# Altium PCB PCB.PcbDoc
Units mil, origin at the board's own origin, x right, y up, seen from the top; angles counter-clockwise.
Board outline 3000 x 2000 mil, 2 copper layers (Top Layer, Bottom Layer); 59 components, 47 nets, 259 pads, 80 vias.
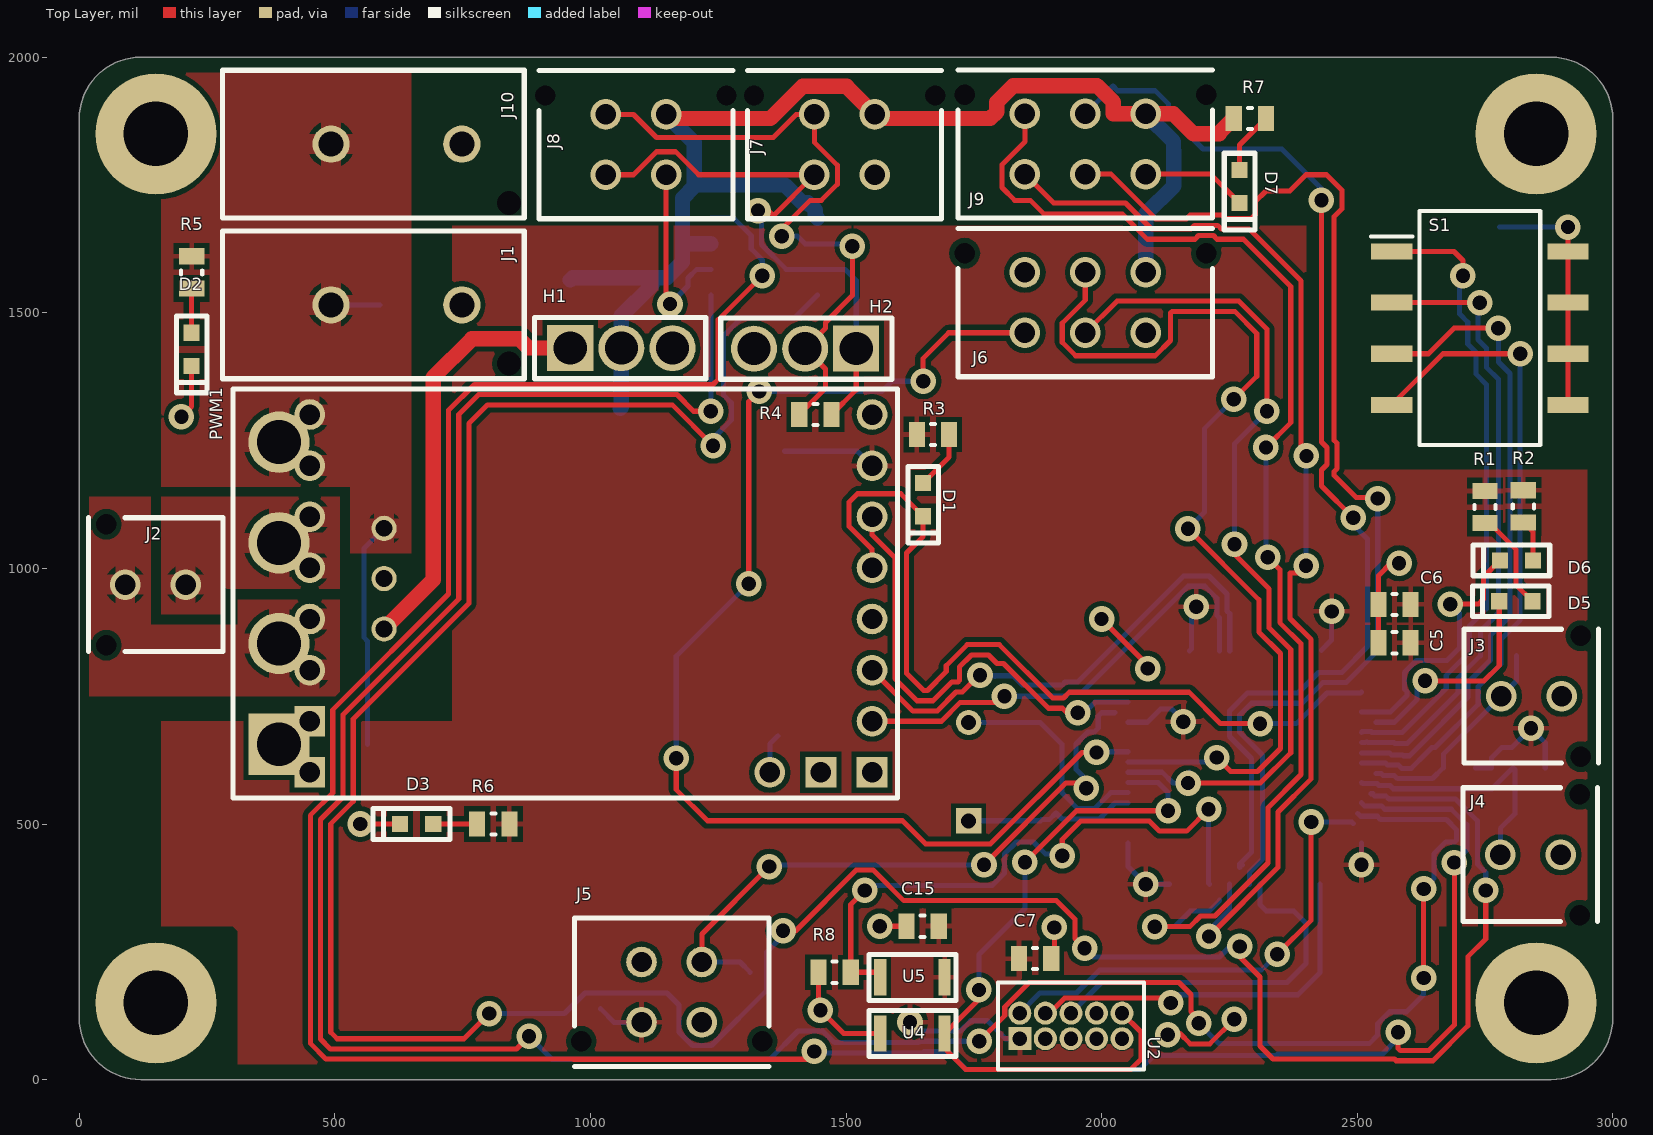
[diagram p0: Top Layer view]
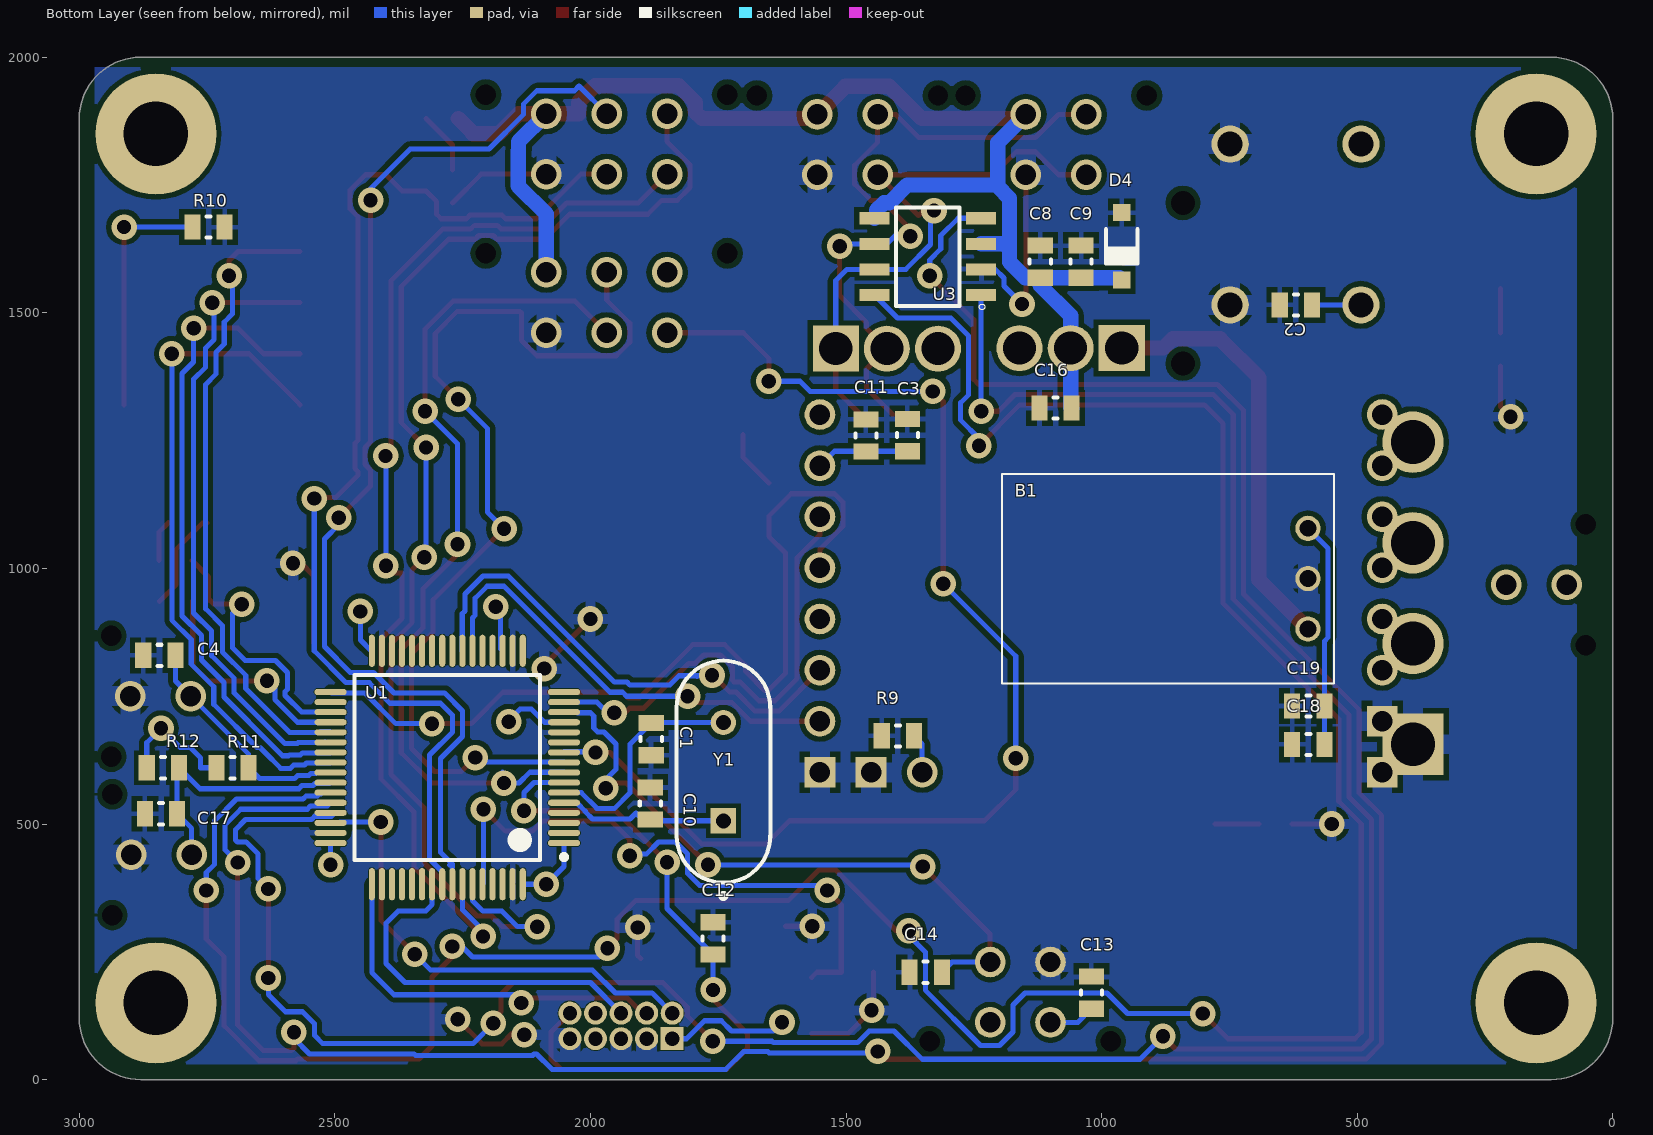
[diagram p1: Bottom Layer view, seen from below]

## Layer stack, top to bottom
Top Solder: solder mask 0.4, Solder Resist, Dk 3.5
Top Layer: signal copper 1.4
Dielectric 1: dielectric 12.6, FR-4, Dk 4.8
Bottom Layer: signal copper 1.4
Bottom Solder: solder mask 0.4, Solder Resist, Dk 3.5

## Board outline
0,120 0,1880 cw(c120,1880) 120,2000 2880,2000 cw(c2880,1880) 3000,1880 3000,120 cw(c2880,120) 2880,0 120,0 cw(c120,120)

## Design rules (kind name [scope] priority, off if disabled: settings)
Clearance PAD_CLEARANCE [InComponent('U1') Or InComponent('U2')] p1: gap=2 ignorepadtopadclearanceinfootprint=TRUE except(0: Arc-Hole Track-Hole SMDPad-Hole THPad-Hole Via-Hole Fill-Hole Poly-Hole Region-Hole Text-Hole)
Clearance [All] p2: gap=10 ignorepadtopadclearanceinfootprint=FALSE except(0: Arc-Hole Track-Hole SMDPad-Hole THPad-Hole Via-Hole Fill-Hole Poly-Hole Region-Hole Text-Hole)
ComponentClearance Ignore [InComponent('PWM1')] p1: gap=0 collisioncheckmode=3 verticalgap=0 showdistances=FALSE
ComponentClearance [All] p2: gap=10 collisioncheckmode=3 verticalgap=10 showdistances=FALSE
PolygonConnect HIGH_CURRENT_POLY [IsNamedPolygon('+24_L01_P004') Or IsNamedPolygon('MOT_OUT_A_L01_P008') Or IsNamedPolygon('MOT_OUT_B_L01_P010') Or IsNamedPolygon('GND_L02_P018')] p1: thpad.connectstyle=Relief thpad.reliefconductorwidth=40 thpad.reliefentries=4 thpad.polygonreliefangle="90 Angle" thpad.airgapwidth=10 smdpad.connectstyle=Relief smdpad.reliefconductorwidth=10 smdpad.reliefentries=4 smdpad.polygonreliefangle="90 Angle" smdpad.airgapwidth=10 via.connectstyle=Relief via.reliefconductorwidth=20 via.reliefentries=4 via.polygonreliefangle="90 Angle" via.airgapwidth=10
PolygonConnect [All] p2: connectstyle=Relief reliefconductorwidth=10 reliefentries=4 polygonreliefangle="90 Angle" airgapwidth=10
RoutingVias [All] p1: holewidth=28 width=50 viastyle="Through Hole" minholewidth=28 minwidth=50 maxholewidth=28 maxwidth=50
SolderMaskExpansion [All] p1: expansion=4
Width 5V [(InNet('SEL_5V') OR InNet('NetB1_3'))] p1: maxlimit=50 minlimit=30 preferedwidth=30 minimp=50.000000 maximp=50.000000 favimp=50.000000
Width [All] p2: maxlimit=10 minlimit=10 preferedwidth=10
29 further rules are at their usual default settings.

## Classes and differential pairs
component class Power: B1 C2 C3 C9 C11 C18 C19 D1 D2 D3 D4 D7 H1 J1 J2 J10 PWM1 R3 R5 R6 R7 R9
component class Peripherals: C4 C7 C8 C13 C14 C16 C17 H2 J3 J4 J5 J6 J7 J8 J9 R4 R11 R12 U2 U3
component class Microcontroller: C1 C5 C6 C10 C12 C15 D5 D6 R1 R2 R8 R10 S1 U1 U4 U5 v Y1

## Components (designator, comment, footprint, x,y, rotation, side; value= is the part's Value field where it differs from the comment)
B1 "OKI-78SR-5_1.5-W36H-C" OKI-78SR-HORIZONTAL 870,980 r90 bottom locked
C1 "Cap Semi" RESC2013X60X35LL10T20 1880.92,666.07 r270 bottom value=20pF
C2 "Cap Semi" RESC2013X60X35LL10T20 620,1515.51 r180 bottom locked value=10uF
C3 "Cap Semi" RESC2013X60X35LL10T20 1379.88,1260.74 r270 bottom value=0.1uF
C4 "Cap Semi" RESC2013X60X35LL10T20 2843.17,830 r0 bottom value=0.1uF
C5 "Cap Semi" RESC2013X60X35LL10T20 2573.09,854.57 r0 top value=10uF
C6 "Cap Semi" RESC2013X60X35LL10T20 2573.09,929.54 r0 top value=0.1uF
C7 "Cap Semi" RESC2013X60X35LL10T20 1870,236.66 r180 top value=0.1uF
C8 "Cap Semi" RESC2013X60X35LL10T20 1120,1600 r270 bottom value=0.1uF
C9 "Cap Semi" RESC2013X60X35LL10T20 1040,1600 r270 bottom value=0.1uF
C10 "Cap Semi" RESC2013X60X35LL10T20 1882.82,540 r90 bottom value=20pF
C11 "Cap Semi" RESC2013X60X35LL10T20 1461.16,1260 r270 bottom value=0.1uF
C12 "Cap Semi" RESC2013X60X35LL10T20 1760,276.35 r270 bottom value=0.1uF
C13 "Cap Semi" RESC2013X60X35LL10T20 1020,170 r90 bottom value=0.1uF
C14 "Cap Semi" RESC2013X60X35LL10T20 1344.05,210 r0 bottom value=0.1uF
C15 "Cap Semi" RESC2013X60X35LL10T20 1650,300 r0 top value=0.1uF
C16 "Cap Semi" RESC2013X60X35LL10T20 1090,1313.52 r180 bottom value=0.1uF
C17 "Cap Semi" RESC2013X60X35LL10T20 2840,520 r0 bottom value=0.1uF
C18 "Cap Semi" RESC2013X60X35LL10T20 595.63,655.85 r180 bottom value=10uF
C19 "Cap Semi" RESC2013X60X35LL10T20 595.63,730.82 r180 bottom value=0.1uF
D1 "RED" LED 1650.96,1134.55 r270 top
D2 "GRN" LED 220,1428.58 r270 top
D3 "GRN" LED 660,500 r180 top
D4 "5.1V" VISH-SOD-123-2_V 960.56,1630 r270 bottom
D5 "GRN" LED 2810.42,935.74 r180 top
D6 "RED" LED 2811.73,1015.75 r180 top
D7 "GRN" LED 2270,1747.22 r270 top
H1 "JMPR_HEADER_3P" STD3P 880.56,1496.02 r0 top
H2 "JMPR_HEADER_3P" STD3P 1600,1365 r180 top
J1 "24V In" 1510482204 280,1660 r270 top locked
J2 "MOT_OUT" 0430450227 208.11,968.11 r90 top locked
J3 "0430450227" 0430450227 2781.89,750 r270 top
J4 "0430450227" 0430450227 2780,440 r270 top
J5 "0430450427" 0430450427 1159.06,170.94 r0 top
J6 "0430450627" 0430450627 2027.17,1520.12 r180 top
J7 "0430450427" 0430450427 1497.17,1829.06 r180 top locked
J8 "0430450427" 0430450427 1089.06,1829.06 r180 top locked
J9 "0430450627" 0430450627 2027.17,1830.29 r180 top
J10 "24V Out" 1510482204 280,1974.49 r270 top locked
PWM1 "6.5V - 40V" Pololu_G2_Driver_24v21 1600.95,1351.01 r180 top locked
R1 "60" RESC2013X60X35LL10T20 2750.03,1120 r90 top
R2 "60" RESC2013X60X35LL10T20 2825,1121.5 r90 top
R3 "60" RESC2013X60X35LL10T20 1670,1262.04 r180 top
R4 "120" RESC2013X60X35LL10T20 1440,1301.01 r180 top
R5 "1.5k" RESC2013X60X35LL10T20 220,1579.17 r90 top
R6 "60" RESC2013X60X35LL10T20 810,500 r0 top
R7 "145" RESC2013X60X35LL10T20 2290,1880 r180 top
R8 "1.5k" RESC2013X60X35LL10T20 1477.82,210 r0 top
R9 "50k" RESC2013X60X35LL10T20 1398.5,672.49 r180 bottom
R10 "1.5k" RESC2013X60X35LL10T20 2746.95,1667.76 r0 bottom
R11 "50k" RESC2013X60X35LL10T20 2700,610 r180 bottom
R12 "50k" RESC2013X60X35LL10T20 2836.5,610 r180 bottom
S1 "219-4MSTR" SOP254P991X385-8N 2740,1470 r0 top locked
U1 "STM32F334R8T6" STM-LQFP64_L 2280,610.49 r0 bottom
U2 "SAMTEC-FTSH-105-01-X-D" SAMTEC-FTSH-105-01-X-D 1940,105 r0 top
U3 "MCP2562-E/SN" SOIC127P600X175-8N 1340,1610 r0 bottom
U4 "B3U-1100P" "B3U-1100P - duplicate" 1630,90 r180 top
U5 "B3U-1100P" "B3U-1100P - duplicate" 1630,200.01 r0 top
Y1 "25MHz" ADAI-THHF-49S3 1740,602.32 r90 bottom

## Footprints (in the part's own frame and the unit in brackets; to place one, negate y for a bottom-side part, rotate by r counter-clockwise, add the part's x,y. Pads: shape width x height; smd on the part's side, far side on the other; paste and mask are expansions set on the pad)
0430450227 [mil] "Molex Micro fit 3.0"
  round 60 hole 40: 1(0,0) 2(0,118.11)
  round 0 hole 40 unplated: ""(-118.11,155.12) ""(118.11,155.12)
  silkscreen extent -131,-73 131,190
0430450427 [mil] "Molex micro-fit 3.0 4 pos"
  round 60 hole 40: 1(-59.06,59.06) 2(-59.06,-59.06) 3(59.06,59.06) 4(59.06,-59.06)
  round 0 hole 40 unplated: 7(177.17,-96.06) ""(-177.17,-96.06)
  silkscreen extent -190,-145 190,145
0430450627 [mil] "Molex micro-fit 3.0 6 position"
  round 60 hole 40: 1(-59.05,59.05) 2(-59.05,-59.06) 3(59.06,59.05) 4(59.06,-59.06) 5(177.17,59.05) 6(177.17,-59.06)
  round 0 hole 40 unplated: 7(295.28,-96.06) ""(-177.16,-96.06)
  silkscreen extent -190,-145 308,145
1510482204 [mm] "Molex 6.5MM 2 pin connector, used for power connections. P/N 1510482204 and similar models."
  round 1.85 hole 1.25: 1(3.67,5.4) 2(3.67,11.9)
  round 0 hole 1.2 unplated: 9(6.59,14.25)
  Top Layer region: 4.826,3.175
  silkscreen extent 0,0 7.34,15
ADAI-THHF-49S3 [mm] "THD, 2-Leads, Body 11.05x4.65mm, Pitch 4.88mm"
  rect 1.25x1.25 hole 0.75: 1(-2.44,0)
  round 1.25 hole 0.75: 2(2.44,0)
  silkscreen extent -6.3,-2.34 5.52,2.33, body extent -5.53,-2.34 5.53,2.33, height 3.5
"B3U-1100P - duplicate" [mm]
  rect 0.6x1.8 smd: 1(-1.6,0) 2(1.6,0)
  silkscreen extent -2.16,-1.14 2.16,1.14
LED [mm]
  rect 0.8x0.8 smd: 1(-0.825,0) 2(0.825,0)
  silkscreen extent -1.65,-0.76 2.16,0.76
OKI-78SR-HORIZONTAL [mm]
  round 1.252 hole 0.835: 1(2.5,-6.95) 2(0,-6.95) 3(-2.5,-6.95)
  silkscreen extent -5.2,-8.25 5.2,8.25
Pololu_G2_Driver_24v21 [mil] "Pololu G2 High-Power Motor Driver 24v21"
  rect 120x120 hole 86: 1(1210,695)
  rect 60x60 hole 40: 1a(1150,750) 1b(1150,650) 14(50,750) 15(150,750)
  round 120 hole 86: 2(1210,498) 3(1210,301) 4(1210,104)
  round 60 hole 40: 2a(1150,550) 2b(1150,450) 3a(1150,350) 3b(1150,250) 4a(1150,150) 4b(1150,50) 7(50,50) 8(50,150) 9(50,250) 10(50,350) 11(50,450) 12(50,550) 13(50,650) 16(250,750)
  silkscreen extent 0,0 1300,800
RESC2013X60X35LL10T20 [mm]
  rect 0.8x1.25 smd: 1(-0.8,0) 2(0.8,0)
  silkscreen extent -0.1,-0.53 0.1,0.53, body extent -1.05,-0.67 1.05,0.67, height 0.6
SAMTEC-FTSH-105-01-X-D [mil]
  rect 45x45 hole 27.95: 1(-100,-25)
  round 45 hole 27.95: 2(-100,25) 3(-50,-25) 4(-50,25) 5(0,-25) 6(0,25) 7(50,-25) 8(50,25) 9(100,-25) 10(100,25)
  silkscreen extent -143,-85 143,85
SOIC127P600X175-8N [mm]
  rect 1.5x0.6 smd: 1(-2.65,1.905) 2(-2.65,0.635) 3(-2.65,-0.635) 4(-2.65,-1.905) 5(2.65,-1.905) 6(2.65,-0.635) 7(2.65,0.635) 8(2.65,1.905)
  silkscreen extent -2.84,-2.45 1.58,2.64
SOP254P991X385-8N [mm]
  rect 2.05x0.8 smd: 1(-4.375,3.81) 2(-4.375,1.27) 3(-4.375,-1.27) 4(-4.375,-3.81) 5(4.375,-3.81) 6(4.375,-1.27) 7(4.375,1.27) 8(4.375,3.81)
  silkscreen extent -5.4,-5.81 3,5.82
STD3P [mil]
  rect 90x90 hole 65: 1(80,-65)
  round 90 hole 65: 2(180,-65) 3(280,-65)
  silkscreen extent 10,-125 345,-5
STM-LQFP64_L [mm] "QFP, 64-Leads, Body 10x10mm, Pitch 0.5mm, IPC High Density"
  oval 1.6x0.3 smd: 1(-5.8,3.75) 2(-5.8,3.25) 3(-5.8,2.75) 4(-5.8,2.25) 5(-5.8,1.75) 6(-5.8,1.25) 7(-5.8,0.75) 8(-5.8,0.25) 9(-5.8,-0.25) 10(-5.8,-0.75) 11(-5.8,-1.25) 12(-5.8,-1.75) 13(-5.8,-2.25) 14(-5.8,-2.75) 15(-5.8,-3.25) 16(-5.8,-3.75) 33(5.8,-3.75) 34(5.8,-3.25) 35(5.8,-2.75) 36(5.8,-2.25) 37(5.8,-1.75) 38(5.8,-1.25) 39(5.8,-0.75) 40(5.8,-0.25) 41(5.8,0.25) 42(5.8,0.75) 43(5.8,1.25) 44(5.8,1.75) 45(5.8,2.25) 46(5.8,2.75) 47(5.8,3.25) 48(5.8,3.75)
  oval 0.3x1.6 smd: 17(-3.75,-5.8) 18(-3.25,-5.8) 19(-2.75,-5.8) 20(-2.25,-5.8) 21(-1.75,-5.8) 22(-1.25,-5.8) 23(-0.75,-5.8) 24(-0.25,-5.8) 25(0.25,-5.8) 26(0.75,-5.8) 27(1.25,-5.8) 28(1.75,-5.8) 29(2.25,-5.8) 30(2.75,-5.8) 31(3.25,-5.8) 32(3.75,-5.8) 49(3.75,5.8) 50(3.25,5.8) 51(2.75,5.8) 52(2.25,5.8) 53(1.75,5.8) 54(1.25,5.8) 55(0.75,5.8) 56(0.25,5.8) 57(-0.25,5.8) 58(-0.75,5.8) 59(-1.25,5.8) 60(-1.75,5.8) 61(-2.25,5.8) 62(-2.75,5.8) 63(-3.25,5.8) 64(-3.75,5.8)
  silkscreen extent -5.92,-4.6 4.6,4.6, body extent -5,-5 5,5, height 1.6
VISH-SOD-123-2_V [mm] "SMD, 2-Leads, Body 2.7x1.55mm, Height 1.35mm"
  rect 0.85x0.85 smd: 1(-1.675,0) 2(1.675,0)
  silkscreen extent -0.85,-0.78 0.85,0.78, body extent -1.35,-0.77 1.35,0.77, height 1.35

## Part data
B1: "Switching Regulator 7-36Vin 5Vo 1.5A Non-Isolated DC-DC Converter, 5V dc Output, 1.5A", Manufacturer_Name="Murata Electronics", Manufacturer_Part_Number=OKI-78SR-5/1.5-W36H-C, Mouser Part Number=580-OKI78SR51.5W36HC, Datasheet Link=https://componentsearchengine.com/Datasheets/1/OKI-78SR-5_1.5-W36H-C.pdf
C1 C2 C3 C4 C5 C6 C7 C8 C9 C10 C11 C12 C13 C14 C15 C16 C17 C18 C19: "Capacitor (Semiconductor SIM Model)", LatestRevisionDate=29-May-2009, LatestRevisionNote="IPC-7351 Footprint Added.", PackageDescription="Chip Capacitor", PackageReference=C1206, Published=8-Jun-2000, Publisher="Altium Limited"
D1 D2 D3 D5 D6 D7: library part LED0, "Typical INFRARED GaAs LED", LatestRevisionDate=08-Jul-2005, LatestRevisionNote="Mech Layer 1 removed.", PackageDescription="LED; 2 Leads", PackageReference=LED-0, Published=8-Jun-2000, Publisher="Altium Limited"
D4: library part CMP-0931-00020-1, Manufacturer="Vishay Semiconductor", Operating Temperature="-55 to 150 degC", PartNumber=MMSZ5232B-E3-08, Power Dissipation (mW)=500, Test Current (IZT1) (mA)=20, Tolerance="+/- 5%", Zener Voltage (NOM.) (V)=5.6, ComponentLink1Description="Manufacturer URL", ComponentLink1URL=http://www.vishay.com/, ComponentLink2Description=Datasheet, ComponentLink2URL=http://www.vishay.com/docs/85774/mmsz5225.pdf, ComponentLink3Description="Package Specification", ComponentLink3URL=http://www.vishay.com/docs/85774/mmsz5225.pdf, DatasheetVersion="Rev. 1.9", Int. Construction=Single, Mounting Technology="Surface Mount", PackageDescription="2-Pin SMD, Body 2.7 x 1.55 mm, Height 1.35 mm", PackageReference=SOD-123-2, PackageVersion="Rev. 1.9", Packing="Tape and Reel", RoHS=TRUE, Zener Impedance (IZT1) (Max.) (Ohm)=11
J1 J10: library part "Molex 6.5MM 2 pin connector", "Molex 6.5MM 2 pin connector, used for power connections. P/N 1510482204 and similar models."
J2: library part "Molex micro-fit 2-pin", "Molex micro-fit 3.0. Molex P/N 0430450227"
J3 J4: library part "0430450227-Single row schematic", "Micro-fit 3.0 connector. P/N 0430450227"
J5 J7 J8: library part "0430450427-Single row schematic", "Molex micro-fit 3.0 dual row header. P/N 0430450427"
J6 J9: library part "0430450627-Single row schematic", "Molex micro-fit 3.0 dual row connector. P/N 0430450627"
PWM1: library part "Pololu G2 High-Power Motor Driver 24v21", "This discrete MOSFET H-bridge motor driver enables bidirectional control of one high-power DC brushed motor. The small 1.3? × 0.8? board supports a wide 6.5 V to 40 V voltage range and is efficient enough to deliver a continuous 21 A without a heat sink. Additional features of this second-generation (G2) driver include reverse-voltage protection along with basic current sensing and current limiting functionality.", ComponentLink1Description="Product Info", ComponentLink1URL=https://www.pololu.com/product/2995/specs
R1 R2 R3 R4 R5 R6 R7 R8 R9 R10 R11 R12: library part RES-2
S1: "DIP Switches / SIP Switches SPST 4 switch sections", Manufacturer_Name=CTS, RS Part Number=1774368, Arrow Part Number=219-4MSTR, Arrow Price/Stock=https://www.arrow.com/en/products/219-4mstr/cts, Datasheet Link=https://www.ctscorp.com/wp-content/uploads/219.pdf, Geometry.Height=3.85mm, Manufacturer_Part_Number=219-4MSTR, RS Price/Stock=http://uk.rs-online.com/web/p/products/1774368
U1: library part CMP-0537-00077-1, "ARM Cortex-M4 32-bit MCU, 64 KB Flash, 16 KB Internal RAM, 51 I/Os, 64-Pin LQFP, -40 to 85 degC, Tray", I/Os (High Current)=51, Operating Frequency(F) (Processor speed) (MHz)=72, Package Description="64-Pin Low-profile Quad Flat Package, Body 10 x 10 mm, Pitch 0.5 mm", Package Reference=LQFP64, Supply Voltage(Vcc) min (V)=2, ComponentLink1Description="Manufacturer URL", ComponentLink1URL=http://www.st.com/, ComponentLink2Description=Datasheet, ComponentLink2URL=http://www.st.com/st-web-ui/static/active/en/resource/technical/document/datasheet/DM00097745.pdf, Core="ARM Cortex-M4", D/A Converter=3, DatasheetVersion="Rev. 4", FLASH Size (Prog) (kB)=64, Internal RAM Size (kB)=16, Mounting Technology="Surface Mount", Packing=Tray
U2: "Conn Unshrouded Header HDR 10 POS 1.27mm Solder ST Thru-Hole Automotive Tube", Package=None, Digi-Key_Part_Number=SAM8909-ND, Digi-Key_Purchase_URL=https://www.digikey.com/product-detail/en/samtec-inc/FTSH-105-01-F-D-K/SAM8909-ND/1850757?utm_source=snapeda&utm_medium=aggregator&utm_campaign=symbol, MF="Samtec Inc.", MP=FTSH-105-01-F-D-K, SnapEDA_Link=https://www.snapeda.com/parts/FTSH-105-01-F-D-K/Samtec%20Inc./view-part/?ref=snap
U3: "Microchip MCP2562-E/SN, CAN Transceiver 1MBps 1-channel IEC 61000-4-2, 8-Pin SOIC", Package="SO-8 Microchip", Availability=Unavailable, MF=Microchip, MP=MCP2562-E/SN, Price=None, SnapEDA_Link=https://www.snapeda.com/parts/MCP2562-E/SN/Microchip/view-part/?ref=snap
Y1: library part CMP-1740-00004-1, Case\Package=PDIP, Max Dual Supply Voltage="15 V", Max Operating Temperature="70 degC", Max Supply Voltage="30 V", Min Dual Supply Voltage="1.75 V", Min Operating Temperature="0 degC", Min Supply Voltage="3.5 V", Nominal Dual Supply Voltage="12 V", Nominal Supply Current="7.5 mA", Nominal Voltage Gain="106.02 dB", Package Quantity=50, Channels=1, ComponentLink1Description="Manufacturer URL", ComponentLink1URL=https://www.adafruit.com/, ComponentLink2Description=Datasheet, ComponentLink2URL=https://cdn-shop.adafruit.com/product-files/2214/2214datasheet.pdf, DatasheetVersion=Nov-14, Elements=1, Height="4.57 mm", Length="9.81 mm", Mount="Through Hole", Nominal Supply Voltage="12 V", PackageDescription="2-Pin Through Hole Device, Body 11.05 x 4.65 mm, Pitch 4.88 mm", PackageReference=THHF-49S3, Packaging=Rail/Tube, Pins=8, Propagation Delay="115 ns", Radiation Hardening=No, REACH SVHC="No SVHC", RoHSCompliant=true, Weight="0.015535 oz", Width="6.35 mm"

## Free pads (board coordinates)
  round 237 hole 125.98: ""(150,150) ""(150,1850) ""(2850,150) ""(2850,1850)

## Via types
v1: diameter 50, hole 28, Top Layer to Bottom Layer, 80 vias

## Nets (pads, with @x,y where several pads share a name; then routed paths per layer and width w, separated by ;. In a path a pad name is that pad's centre, name@x,y a point inside that pad or via, vN(x,y) a via of type N, cw(c..) or ccw(c..) an arc to the next point about the centre after c; other vN are vias at no path point)
3V3: C3.2 C5.2 C6.2 C7.2 C11.2 C13.1 C15.2 J5.2 PWM1.8 R1.2 R2.2 R3.2 R6.2 R11.1 R12.1 U1.1 U1.13 U1.19 U1.32 U1.48 U1.64 U2.1 U5.2 | length 1288.3
  Top Layer w10: v1(1625.22,112.2) v1@1625.22,115.28 ; v1@2141.95,699.08 2142.87,700 v1(2160,700) ; v1(2450,915.86) v1@2450,930.1
  Bottom Layer w10: C13.1 1046.62,111.89 J5.2 ; C3.2 1522.73,1229.24 PWM1.8 ; v1(1625.22,112.2) 1642.4,95.02 1723.84,95.02 1743.84,115.02 1776.98,115.02 1812,80 U2.1 ; U1.1 2051.66,416.71 v1(2086.22,382.15) U1.64 ; U1.13 2089.66,699.08 2115.62,725.04 2137.38,725.04 2160,702.42 v1(2160,700) ; U1.19 2175.51,842.62 2175.51,919.64 2180.87,925 v1(2185.44,925) ; U1.32@2430,840 2450,860 v1(2450,915.86) ; v1(2508.35,420) U1.48 ; R11.1 2762.87,610 2762.87,629.44 2783.04,649.61 2802.48,649.61 v1(2840,687.13) 2867.99,659.13 R12.1
+24: B1.1 C2.2 C18.2 C19.2 J1.1 J10.1 PWM1.4 PWM1.4a PWM1.4b R5.2 | length 538
  Bottom Layer w10: J1.1 C2.2 ; C18.2 C19.2 564.13,857.74 556.72,865.15 556.72,1038.77 B1.1
BOOT0: R8.2 U1.60 U5.1 | length 1199.4
  Top Layer w10: v1(1536.6,370) 1509.32,342.72 R8.2 1557.02,210 U5.1 ; v1(1922.95,437.65) 1922.95,469.67 1959.27,505.99 2093.43,505.99 2113.43,485.99 2166.39,485.99 v1(2209.28,528.88)
  Bottom Layer w10: v1(1536.6,370) 1546.6,380 1786.57,380 1810,403.43 1810,441.57 1833.43,465 1866.57,465 1890,441.57 1919.03,441.57 v1(1922.95,437.65) ; v1(2209.28,528.88) 2209.28,383.97 U1.60
CAN_ADDR0: S1.1 U1.37 | length 1243.7
  Top Layer w10: S1.1 2689.17,1620 2706.82,1602.35 v1(2706.82,1572.62)
  Bottom Layer w10: U1.37@2508.35,679.08 2509.92,680.65 2527.52,680.65 2529.09,679.08 2588.36,679.08 2674.25,764.97 2674.25,790.85 2720,836.6 2720,888.17 2752.7,920.87 2752.7,1360 2732.7,1380 2732.7,1422.45 2716.21,1438.94 2716.21,1481.75 2700,1497.95 2700,1565.79 v1(2706.82,1572.62)
CAN_ADDR1: S1.2 U1.38 | length 1218.3
  Top Layer w10: S1.2 v1(2740,1520)
  Bottom Layer w10: U1.38@2508.35,659.08 2516.63,659.08 2518.21,660.65 2519.23,660.65 2520.81,659.08 2571.78,659.08 2573.46,657.39 2597.76,657.39 2696.89,756.52 2696.89,785.21 2740.93,829.24 2740.93,877.39 2776.21,912.67 2776.21,1370 2752.7,1393.51 2752.7,1431.02 2736.21,1447.51 2736.21,1516.21 v1(2740,1520)
CAN_ADDR2: S1.3 U1.39 | length 1252.6
  Top Layer w10: S1.3 2639.47,1420 2689.47,1470 v1(2776.21,1470)
  Bottom Layer w10: U1.39@2508.35,639.08 2563.49,639.08 2567.44,635.13 2588.99,635.13 2590.6,633.53 2602.18,633.53 2617.76,649.1 2716.89,748.24 2716.89,776.92 2760.93,820.96 2760.93,869.1 2798.84,907.02 2798.84,1381.16 2776.21,1403.79 v1(2776.21,1470)
CAN_ADDR3: S1.4 U1.40 | length 1296.9
  Top Layer w10: S1.4 2667.76,1420 v1(2818.84,1420)
  Bottom Layer w10: U1.40@2508.35,619.08 2555.21,619.08 2559.15,615.13 2580.71,615.13 2586.9,608.94 2605.87,608.94 2637.76,640.82 2646.54,649.61 2652.33,649.61 2736.89,734.16 2736.89,768.64 2780.93,812.68 2780.93,860.82 2818.84,898.73 v1(2818.84,1420)
CAN_H: H2.1 J7.3 J8.3 R4.1 U3.7 | length 1159.1
  Top Layer w10: J8.3 1084.47,1770 1129.47,1815 1166.75,1815 1211.75,1770 J7.3 1358.11,1690 1348.11,1700 v1(1327.83,1700) ; R4.1 1520,1349.52 H2.1
  Bottom Layer w10: v1(1327.83,1700) 1334.59,1693.24 1334.59,1633.43 1383.02,1585 U3.7 1498.19,1585 1520,1563.19 H2.1
CAN_L: H2.2 J7.4 J8.4 R4.2 U3.6 | length 1311.1
  Top Layer w10: J8.4 1084.47,1888.11 1129.47,1843.11 1357.75,1843.11 1402.75,1888.11 J7.4 1438.11,1833.64 1483.11,1788.64 1483.11,1751.36 1451.75,1720 1430,1720 1374.59,1664.59 v1(1374.59,1650) ; R4.2 1460,1352.51 1460,1390 H2.2 1460,1470 1460,1481.21 1512.43,1533.65 v1(1512.43,1630)
  Bottom Layer w10: v1(1374.59,1650) 1405,1650 1420,1635 U3.6 1507.43,1635 v1(1512.43,1630)
GND: B1.2 C1.2 C2.1 C3.1 C4.2 C5.1 C6.1 C7.1 C8.1 C9.1 C10.2 C11.1 C12.1 C13.2 C14.2 C15.1 C16.1 C17.2 C18.1 C19.1 D2.2 D3.2 D4.1 D7.2 J1.2 J3.2 J4.2 J5.1 J6.1 J7.1 J8.1 J9.1 J10.2 PWM1.1 PWM1.1a PWM1.1b PWM1.14 PWM1.15 R8.1 R9.1 R10.1 U1.12 U1.18 U1.31 U1.47 U1.63 U2.3 U2.5 U2.9 U3.2 U4.2 | length 1573.5
  Top Layer w10: v1(200,1296.75) 220,1316.75 D2.2 ; v1(550,500) D3.2 ; J8.1 1148.11,1524.72 v1(1155.73,1517.1) ; R8.1 1446.33,139.11 v1(1450,135.43) 1495.43,90 U4.2 ; v1(1566.27,300) C15.1 ; C7.1 1907.66,242.83 v1(1907.66,297.66) ; v1(2000,901.01) 2090,811.01 v1(2090,804.13) ; J9.1 2213.51,1771.23 D7.2 ; v1(2129.28,87.49) 2150.93,87.49 2153.43,90 2173.43,70 2211.53,70 v1(2259.31,117.78) ; C5.1 C6.1 2541.59,985.85 2567.37,1011.63 2580.31,1011.63 v1(2581.94,1010)
  Bottom Layer w10: v1(1155.73,1517.1) 1191.14,1552.51 1191.14,1568.06 1208.08,1585 U3.2 ; v1(1907.66,297.66) v1@1910,300 ; v1(2259.31,117.78) v1@2260,117.78
MOT_OUT_A: J2.1 PWM1.3 PWM1.3a PWM1.3b
MOT_OUT_B: J2.2 PWM1.2 PWM1.2a PWM1.2b
NetB1_3: B1.3 H1.1 | length 838.7
  Top Layer w30: B1.3 692.48,977.68 692.48,1373.5 768.15,1449.17 861.16,1449.17 879.31,1431.02 H1.1
NetC4_1: C4.1 J3.1 R11.2 U1.41 | length 424
  Bottom Layer w10: U1.41@2536.75,599.08 2546.92,599.08 2550.87,595.13 2572.42,595.13 2578.62,588.94 2647.44,588.94 R11.2 2668.5,636.61 J3.1 2811.67,779.78 C4.1
NetC12_2: C12.2 U1.7 U2.10 U4.1 | length 1387.8
  Top Layer w10: v1(1760,175.39) 1760,157.01 U4.1 1692.99,60.6 1733.59,20 2057.08,20 2077.08,40 2077.08,92.92 U2.10 ; v1(1850,425) 1950.99,525.99 v1(2130,525.99)
  Bottom Layer w10: v1(1760,175.39) C12.2 1850,334.85 v1(1850,425) ; U1.7@2051.66,581.28 2059.94,581.28 2060.26,580.97 2110.48,580.97 2130,561.45 v1(2130,525.99)
NetC14_1: C14.1 J5.3 U1.14 | length 1268.2
  Top Layer w10: J5.3 1218.11,284.82 v1(1350,416.71) ; v1(1770,420) 1774.61,420 1774.61,424.61 1930.04,580.04 1959.96,580.04 v1(1970,570) 1954.52,570 v1@1951.68,567.16
  Bottom Layer w10: J5.3 1292.56,230 C14.1 ; v1(1350,416.71) 1353.29,420 v1(1770,420) ; v1(1970,570) 1970,587.16 1950,607.16 1950,656.57 1973.43,680 1985.55,680 1993.52,687.97 1993.52,711.22 2000,717.7 2025.32,717.7 U1.14@2026.07,718.45
NetC17_1: C17.1 J4.1 R12.2 U1.42 | length 501.9
  Bottom Layer w10: U1.42 2510.24,579.08 2538.64,579.08 2542.58,575.13 2564.14,575.13 2570.33,568.94 2763.94,568.94 R12.2 2808.5,606.5 C17.1 2780,491.5 J4.1
NetD1_1: D1.1 R3.1 | length 115.9
  Top Layer w10: D1.1 1701.5,1217.57 R3.1
NetD1_2: D1.2 PWM1.10 U1.33 | length 1684.6
  Top Layer w10: PWM1.10 1550.95,1037.37 1505.95,1082.37 1505.95,1129.49 1522.48,1146.01 1607.02,1146.01 D1.2 1650.96,1062.46 1618.5,1030 1618.5,794.75 1652.06,761.19 1659.18,761.19 1696.21,798.22 1696.21,809.77 1737.3,850.85 1799.81,850.85 1904.28,746.39 1925.69,746.39 1936.95,757.65 2171.3,757.65 2232.69,696.26 v1(2310,696.26)
  Bottom Layer w10: v1(2310,696.26) 2380.6,696.26 2440.86,756.52 2506.74,756.52 U1.33
NetD2_1: D2.1 R5.1 | length 86.6
  Top Layer w10: D2.1 R5.1
NetD3_1: D3.1 R6.1 | length 86
  Top Layer w10: D3.1 R6.1
NetD5_1: D5.1 R1.1 | length 196.6
  Top Layer w10: R1.1 2759.21,1088.5 2810.42,1037.29 2810.42,968.22 D5.1
NetD6_1: D6.1 R2.1 | length 82.2
  Top Layer w10: R2.1 2844.21,1070.79 D6.1
NetD7_1: D7.1 R7.1 | length 121.6
  Top Layer w10: D7.1 2270,1828.5 R7.1
NetJ6_3: J6.3 U1.8 | length 1678.2
  Top Layer w10: J6.3 1968.23,1461.06 2030,1522.83 2268.67,1522.83 2323.51,1467.99 v1(2323.51,1307.5) ; v1(2169.14,580.04) 2310.61,580.04 2370,639.43 2370,841.58 2327.65,883.92 2327.65,960 2260,1027.65 v1(2260,1046.98)
  Bottom Layer w10: U1.8@2051.66,601.28 2118.45,601.28 2139.7,580.04 v1(2169.14,580.04) 2169.14,598.65 v1@2171.77,601.28 ; v1(2260,1046.98) 2260,1243.99 v1(2323.51,1307.5)
NetJ6_4: J6.4 U1.9 | length 1906.6
  Top Layer w10: J6.4 1968.11,1524.7 1923.11,1479.7 1923.11,1442.42 1949.47,1416.06 2104.86,1416.06 2134.82,1446.02 2134.82,1499.48 2138.17,1502.83 2260.39,1502.83 2303.51,1459.71 2303.51,1375.87 v1(2258.5,1330.86) ; v1(2168.87,1077.55) 2307.65,938.77 2307.65,875.64 2350,833.29 2350,647.71 2304.95,602.66 2252.44,602.66 v1(2225.1,630)
  Bottom Layer w10: U1.9@2051.66,621.28 2216.38,621.28 v1(2225.1,630) ; v1(2168.87,1077.55) 2201.69,1110.37 2201.69,1274.05 v1(2258.5,1330.86)
NetJ6_5: J6.5 U1.10 | length 2442.1
  Top Layer w10: v1(1168.03,628.49) 1168.03,567.16 1228.93,506.26 1610.58,506.26 1655.67,461.17 1782.89,461.17 1961.72,640 v1(1990,640) ; v1(1309.84,970) 1309.84,1326.06 v1(1330,1346.22) ; v1(1650.96,1366.17) 1650.96,1410.96 1701.06,1461.06 J6.5
  Bottom Layer w10: v1(1168.03,628.49) 1168.03,828.19 v1(1309.84,970) ; v1(1330,1346.22) 1570.06,1346.22 1590,1366.17 v1(1650.96,1366.17) ; v1(1990,640) 1999.82,640 2001.1,641.28 U1.10@2051.66,641.28
NetJ9_3: J9.3 U1.56 | length 2259.9
  Top Layer w10: J9.3 2018.77,1771.23 2106.01,1683.99 2166.07,1683.99 2173.26,1691.18 2235.4,1691.18 2242.59,1683.99 2291.96,1683.99 2300.75,1692.78 2300.75,1717.51 2321.5,1738.26 2368.26,1738.26 2400,1770 2440,1770 2470.05,1739.95 2470.05,1703.43 2455,1688.38 2455,1250.6 2460.74,1244.85 2460.74,1195.15 2455,1189.4 2455,1181.67 2497.69,1138.98 2537.94,1138.98 v1(2540.26,1136.67)
  Bottom Layer w10: U1.56@2289.53,382.15 2289.53,405.99 2314.9,431.36 2314.9,634.79 2270,679.69 2270,712.83 2293.43,736.26 2392.32,736.26 2432.58,776.52 2477.99,776.52 2540.26,838.78 v1(2540.26,1136.67)
NetJ9_4: J9.4 U1.57 | length 2184.8
  Top Layer w10: v1(2430.05,1720) 2430.05,1247.26 2440.74,1236.57 2440.74,1203.43 2430,1192.69 2430,1161.36 v1(2492.39,1098.98)
  Bottom Layer w10: J9.4 2022.23,1943.46 2031.35,1934.34 2104.86,1934.34 2131.22,1907.98 2131.22,1887.67 2198.36,1820.53 2352.43,1820.53 2430.05,1742.91 v1(2430.05,1720) ; 2275.39,420.13 2270.16,414.9 2270.16,421.8 2293.05,444.7 2293.05,628.36 2250,671.41 2250,721.12 2285.15,756.26 2384.04,756.26 2424.29,796.52 2469.71,796.52 2520.26,847.07 2520.26,1057.7 2492.39,1085.57 v1(2492.39,1098.98)
NetJ9_5: J9.5 U1.58 | length 2174.7
  Top Layer w10: J9.5 1906.49,1714.74 2046.98,1714.74 2097.73,1663.99 2174.36,1663.99 2181.55,1671.18 2227.11,1671.18 2234.3,1663.99 2288.63,1663.99 2390,1562.62 2390,1230.74 v1(2400.74,1220) ; v1(2210,280) 2345.3,415.3 2345.3,523.67 2410,588.37 2410,860.9 2368.75,902.15 2368.75,991.21 2385.87,991.21 v1(2400,1005.34)
  Bottom Layer w10: v1(2210,280) 2201.69,280 2200.05,281.63 2250.47,332.06 U1.58 ; v1(2400,1005.34) 2400,1219.26 v1(2400.74,1220)
NetJ9_6: J9.6 U1.59 | length 2440.1
  Top Layer w10: J9.6 1850,1834.87 1805,1789.87 1805,1744.95 1829.95,1720 1860.44,1720 1887.67,1692.78 2040.65,1692.78 2089.44,1643.99 2182.64,1643.99 2189.83,1651.18 2218.83,1651.18 2226.02,1643.99 2277.62,1643.99 2370,1551.61 2370,1285.07 v1(2321.5,1236.57) ; v1(2104.23,299.14) 2172.57,299.14 2193.43,320 2221.72,320 2325.3,423.59 2325.3,531.96 2390,596.65 2390,852.62 2348.75,893.86 2348.75,998.05 v1(2324.78,1022.02)
  Bottom Layer w10: v1(2104.23,299.14) 2142.57,299.14 2173.43,330 2210.47,330 2230.47,350 U1.59@2230.47,350.86 ; v1(2321.5,1236.57) 2321.5,1022.02 v1(2324.78,1022.02)
NetPWM1_12: PWM1.12 U1.23 | length 981.8
  Top Layer w10: PWM1.12 1630.78,721.19 1678.51,721.19 1715.31,757.99 1727.42,757.99 1760.28,790.85 v1(1762.15,790.85)
  Bottom Layer w10: v1(1762.15,790.85) 1789.15,790.85 1791.72,788.28 1793.43,790 1826.57,790 1844.74,771.82 1922.84,771.82 1928.67,777.65 1953.23,777.65 2160.58,985 2210.29,985 2245.44,949.85 2245.44,916.72 2250.79,911.36 U1.23@2250.79,838.84
NetPWM1_13: PWM1.13 U1.22 | length 899
  Top Layer w10: PWM1.13 1686.62,701.01 1723.59,737.99 1798.79,737.99 1810,749.19 v1(1810,750)
  Bottom Layer w10: v1(1810,750) 1929.3,750 1936.95,757.65 1961.52,757.65 2168.87,965 2202,965 2225.44,941.57 2225.44,908.43 2230.79,903.08 U1.22
NetPWM1_16: PWM1.16 R9.2 | length 78.1
  Bottom Layer w10: PWM1.16 1350.95,656.43 R9.2
NetR10_2: R10.2 S1.5 S1.6 S1.7 S1.8 | length 481.6
  Top Layer w10: S1.5 S1.6 S1.7 S1.8 v1(2912.24,1667.76)
  Bottom Layer w10: R10.2 v1(2912.24,1667.76)
NetU1_43: U1.43 U3.8 | length 5778.4
  Top Layer w10: v1(801.91,129.15) 752.76,80 504.71,80 492.05,92.65 492.05,500.34 536.01,544.29 536.01,705.39 762.48,931.86 762.48,1283.74 798.74,1320 1160,1320 v1(1240,1240) ; v1(1376.83,290.94) 1400.97,290.94 1520.03,410 1553.17,410 1613.17,350 1911.9,350 1947.66,314.23 1947.66,276.02 v1(1966.74,256.94) ; v1(2270,260.42) 2270,240.79 2310,200.79 2310,65.58 2335.49,40.08 2572.93,40.08 2576.09,36.92 2648.28,36.92 2716.5,105.14 2716.5,240.27 2751.47,275.24 v1(2751.47,370)
  Bottom Layer w10: v1(801.91,129.15) 949.08,129.15 989.18,169.25 1050.82,169.25 1050.9,169.17 1150,169.17 1173.11,146.06 1173.11,93.25 1199.47,66.89 1236.75,66.89 1344.8,174.94 1344.8,249.61 1376.83,281.63 v1(1376.83,290.94) ; v1(1240,1240) 1240,1254.33 1275.67,1290 1275.67,1324.07 1260,1339.74 1260,1454.85 1295.15,1490 1399.33,1490 U3.8 ; v1(1966.74,256.94) 1983.68,240 2230.79,240 2251.21,260.42 v1(2270,260.42) ; U1.43@2527.52,559.08 2530.35,559.08 2534.3,555.13 2555.85,555.13 2562.05,548.94 2692.5,548.94 2735,506.44 2735,421.36 2751.47,404.89 v1(2751.47,370)
NetU1_44: U1.44 U3.4 | length 5317.5
  Top Layer w10: v1@1336.22,1575.23 v1(1336.22,1572.62) 1250,1486.39 1250,1370 1240,1360 773.18,1360 722.48,1309.3 722.48,949.9 495.95,723.37 495.95,560.81 452.05,516.91 452.05,70.91 482.96,40 967.27,40 967.39,39.88 1422.97,39.88 v1(1438.11,55.02) ; v1(2580,92.82) 2580,61.3 2584.38,56.92 2640,56.92 2690,106.92 v1(2690,424.61)
  Bottom Layer w10: U3.4 1280.64,1685 1314.59,1651.05 1314.59,1625.15 1336.22,1603.52 v1(1336.22,1572.62) ; v1(1438.11,55.02) 1440.93,52.2 1650.07,52.2 1652.89,55.02 1700.02,55.02 1735.04,20 2075.38,20 2105.38,50 2110.2,50 2112.71,47.49 2342.44,47.49 2345.26,50.31 2549.49,50.31 2580,80.83 v1(2580,92.82) ; U1.44 2514.81,535.13 2547.57,535.13 2553.76,528.94 2684.22,528.94 2714.54,498.62 2714.54,449.14 v1(2690,424.61)
NetU1_45: U1.45 U3.1 | length 5063
  Top Layer w10: v1(880,84.71) 855.29,60 491.25,60 472.05,79.2 472.05,508.62 516.01,552.58 516.01,713.67 742.48,940.15 742.48,1301.01 781.47,1340 1169.19,1340 1201.68,1307.5 v1(1235.67,1307.5) ; v1(1760.41,75.02) 1810.5,125.11 1810.5,142.22 1858.28,190 2151.61,190 2175.04,166.57 2175.04,133.43 2190,118.47 v1(2190,110) ; v1(2630,198.71) v1(2630,373.01)
  Bottom Layer w10: v1(880,84.71) 924.82,39.88 1350.72,39.88 1405.86,95.02 1454.68,95.02 1477.5,72.2 1641.79,72.2 1644.61,75.02 v1(1760.41,75.02) ; v1(1235.67,1307.5) U3.1 ; v1(2190,110) 2229.69,70.31 2523.62,70.31 2540,86.69 2540,109.39 2563.43,132.82 2596.57,132.82 2630,166.25 v1(2630,198.71) ; U1.45@2500.99,520.67 2506.53,515.13 2539.28,515.13 2545.48,508.94 2674.55,508.94 2694.54,488.95 2694.54,468.72 2690.42,464.61 2673.43,464.61 2650,441.17 2650,393.01 v1(2630,373.01)
NetU1_46: U1.46 U2.2 | length 921.1
  Top Layer w10: v1(2343.79,245.44) 2410,311.65 v1(2410,503.92)
  Bottom Layer w10: U2.2 1879.17,169.17 1950.89,169.17 1995.84,214.12 2312.47,214.12 v1(2343.79,245.44) ; v1(2410,503.92) 2489.46,503.92 U1.46@2492.39,500.99
NetU1_49: U1.49 U2.4 | length 751.1
  Top Layer w10: U2.4 1898.28,130 1927.78,159.5 2125.54,159.5 v1(2135.04,150)
  Bottom Layer w10: v1(2135.04,150) 2151.04,166.01 2384.12,166.01 2427.64,209.53 U1.49
NetU1_55: U1.55 U2.6 | length 724.3
  Bottom Layer w10: U2.6 2000,190 2362.88,190 2400,227.12 2400,305.96 2375.96,330 2322,330 2309.53,342.47 U1.55
OSC_1: C10.1 U1.5 Y1.1 | length 336.4
  Bottom Layer w10: Y1.1 1880.57,506.26 C10.1 1897.64,508.5 1910.72,521.59 1922.31,510 1995.9,510 2010,524.1 2010,525.15 2026.13,541.28 U1.5@2051.66,541.28
OSC_2: C1.1 U1.6 Y1.2 | length 450.7
  Bottom Layer w10: Y1.2 1880.1,698.38 C1.1 1922.43,656.06 1922.43,561 1953.43,530 1987.62,530 1987.62,531.05 2017.85,561.28 U1.6
PROG_FLT: D6.2 U1.35 | length 527
  Top Layer w10: v1(2682.35,930) 2736.95,930 2746.95,940 2746.95,983.45 D6.2
  Bottom Layer w10: U1.35 2508.66,719.08 2564.8,719.08 2597.33,751.6 2597.33,758.89 2592.75,763.47 2592.75,796.61 2616.18,820.04 2675.15,820.04 2700,844.89 2700,912.35 v1(2682.35,930)
PROG_RUN: D5.2 U1.36 | length 424.9
  Top Layer w10: v1(2632.75,780.04) 2748.29,780.04 2777.94,809.69 D5.2
  Bottom Layer w10: U1.36@2537.38,699.08 2573.09,699.08 2617.33,743.31 2617.33,764.61 v1(2632.75,780.04)
RAW_MOT_CS: PWM1.9 U1.15 | length 935.6
  Top Layer w10: PWM1.9 1550.95,1065.66 1595.95,1020.66 1595.95,784.3 1639.07,741.19 1670.22,741.19 1707.03,777.99 1719.13,777.99 1722.15,781.01 1722.15,807.42 1745.58,830.85 1778.72,830.85 1795.43,814.14 1808.25,814.14 1895.99,726.39 1923.45,726.39 1932.19,717.65 v1(1953.52,717.65)
  Bottom Layer w10: v1(1953.52,717.65) 1953.52,704.54 1987.43,738.45 U1.15
SEL_5V: C8.2 C9.2 C16.2 D4.2 H1.2 J6.2 J7.2 J8.2 J9.2 R7.2 U3.3 U3.5 | length 2801.3
  Top Layer w30: J8.2 1148.11,1880.12 1352.34,1880.12 1415.33,1943.11 1501.22,1943.11 J7.2 1564.33,1880 1781.89,1880 1795,1893.11 1795,1912.12 1827.22,1944.34 1990.89,1944.34 2023.11,1912.12 2023.11,1889.34 J9.2 2140.66,1889.34 2180,1850 2230,1850 2230,1851.5 R7.2
  Bottom Layer w30: D4.2 965.01,1568.5 C9.2 C8.2 ; C16.2 1060.56,1315.58 H1.2 1060.56,1494.44 1120,1553.88 C8.2 ; J8.2 1203.11,1833.11 1203.11,1747.22 ; U3.3 1190.16,1635 1180,1624.84 ; U3.5 1440,1689.33 1440,1700.71 1425.71,1715 1415.33,1715 1380.33,1750 1205.89,1750 1203.11,1747.22 ; J6.2 2086.22,1693.45 2141.22,1748.45 2141.22,1817.32 2140.58,1817.96 2140.58,1834.98 J9.2 ; C8.2 1149.16,1568.5 1180,1599.35 1180,1624.84 ; 1180,1624.84 1180,1724.11 1203.11,1747.22
pads on no net: H1.3 H2.3 J1.9 J2. J3. J4. J5. J5.4 J5.7 J6. J6.6 J6.7 J7. J7.7 J8. J8.7 J9. J9.7 J10.9 PWM1.7 PWM1.11 U1.2 U1.3 U1.4 U1.11 U1.16 U1.17 U1.20 U1.21 U1.24 U1.25 U1.26 U1.27 U1.28 U1.29 U1.30 U1.34 U1.50 U1.51 U1.52 U1.53 U1.54 U1.61 U1.62 U2.7 U2.8

## Polygon pours and split planes (outlines as drawn)
3V3 on Top Layer "3V3_L01_P020" (solid, pour order 20): 160,701.01 730,701.01 730,1670 2400,1670 2400,1192.78 2950,1192.78 2950,300 2660,300 2660,30 310,30 310,290 300,300 160,300
MOT_OUT_B on Top Layer "MOT_OUT_B_L01_P010" (solid, pour order 10): 310,939.06 510,939.06 510,750 20,750 20,1140 140,1140 140,890 310,890
+24 on Top Layer "+24_L01_P004" (solid, remove dead copper, pour order 4): 160,1970 650,1970 650,1030 530,1030 530,1160 160,1160
MOT_OUT_A on Top Layer "MOT_OUT_A_L01_P008" (solid, pour order 8): 510,1140 510,960 288.11,960 280,968.11 280,910 160,910 160,1140
GND on Bottom Layer "GND_L02_P018" (solid, pour order 18): 70,1980 70,30 2970,30 2970,1980

## Silkscreen, mask and mechanical layers (free items; w line width, h text height)
Mechanical 1:
  the board outline again, w10